# EAGLE board Navila_TugasDay0 (EAGLE 7.5.0)
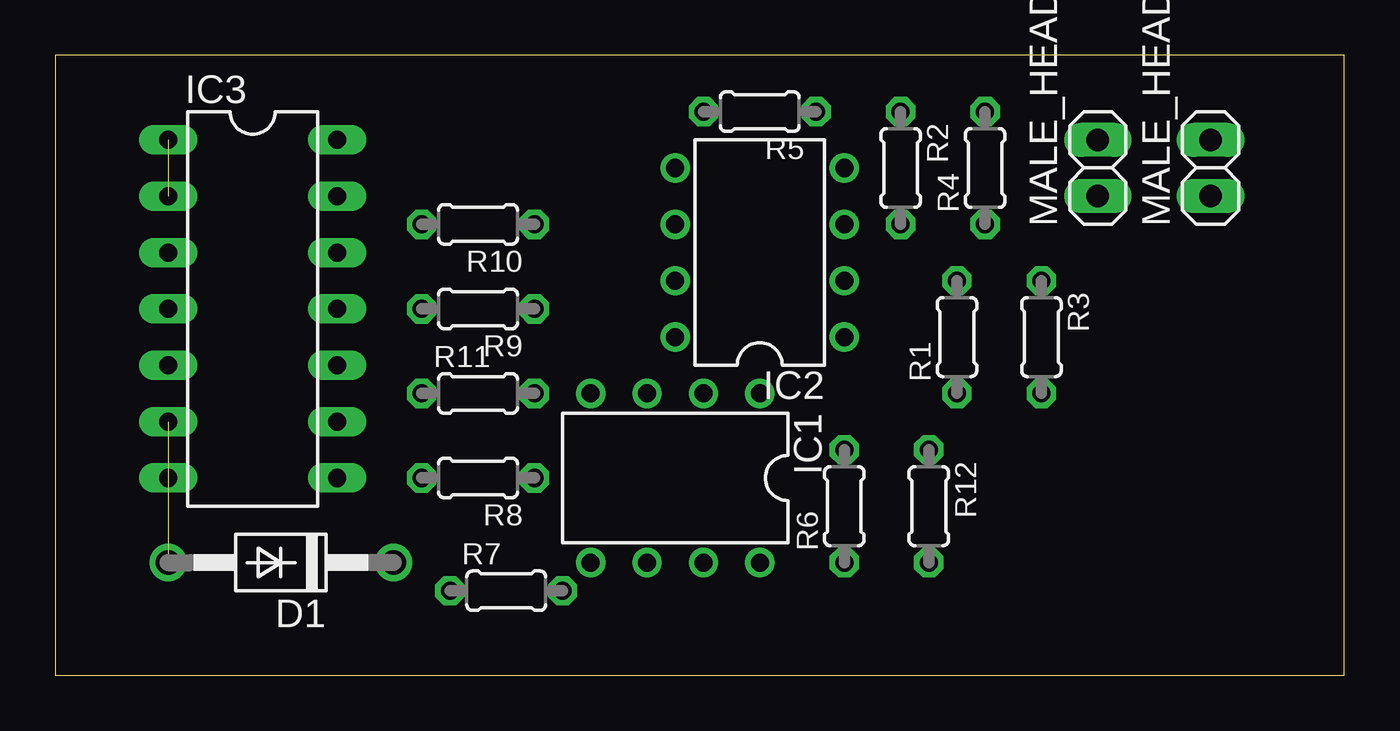
[diagram p0: board, top side]
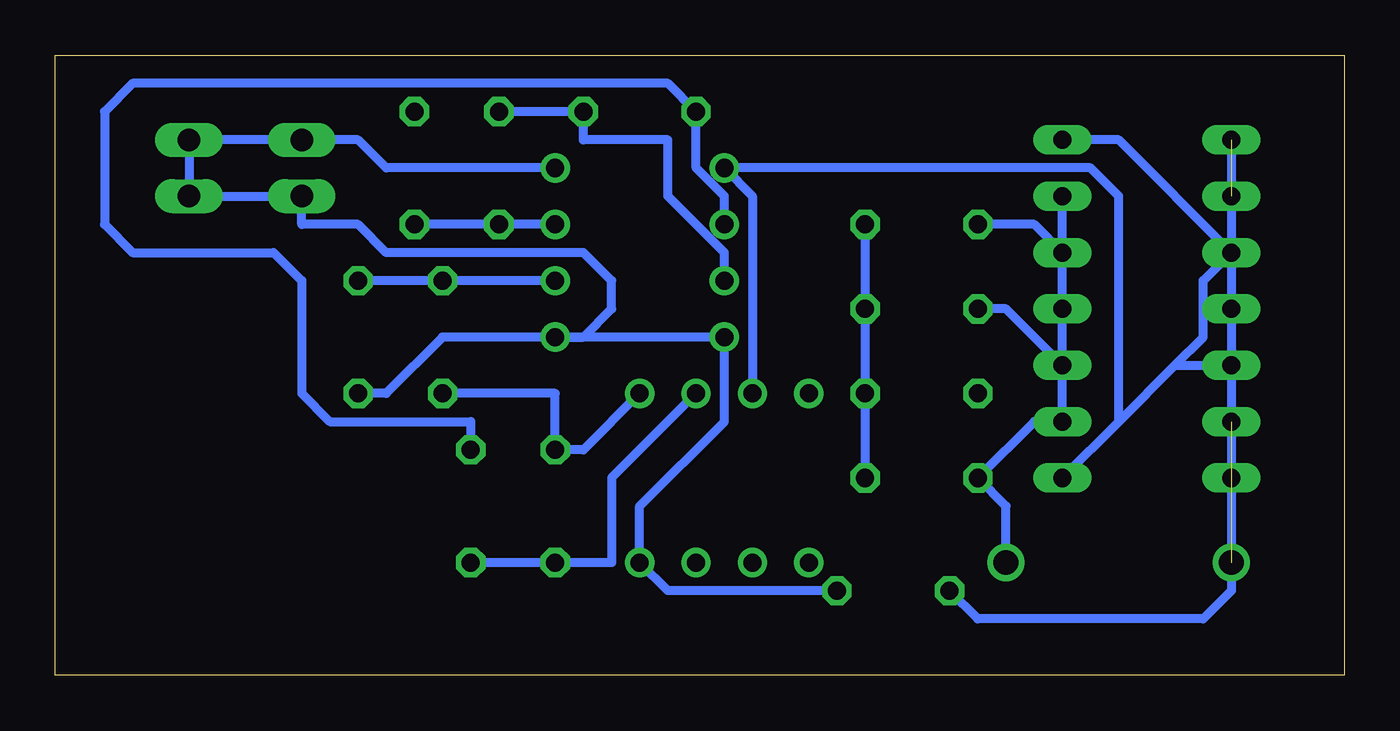
[diagram p1: board, bottom side, seen from below]

Size 58.09 x 27.93 mm. Coordinates in mm from the lower left corner, seen from the top.
Outline: 0,0 58.09,0 58.09,27.93 0,27.93 0,0
Copper layers (1*16): Top 0.035mm / dielectric 1.5mm / Bottom 0.035mm
Design rules "default": minimum track width 10mil, minimum drill 24mil, track to track 8mil, track to pad 8mil, pad to pad 8mil, via to via 8mil, smd to smd 8mil, copper to edge 40mil, drill to drill 8mil, minimum pad ring 10mil, minimum via ring 8mil, stop-mask expansion 4mil, vias tented up to drill 0mil, thermal gap 10mil

## Footprints (pad centres in the part's own frame; a part is rotated, then mirrored left to right if it is on the bottom)
DO41-10 = drill 1.118: A 5.08,0; C -5.08,0
DIL08 = drill 0.813 pad 1.27: 1 -3.81,-3.81; 2 -1.27,-3.81; 3 1.27,-3.81; 4 3.81,-3.81; 5 3.81,3.81; 6 1.27,3.81; 7 -1.27,3.81; 8 -3.81,3.81
DIL14 = drill 0.813 long: 1 -7.62,-3.81; 2 -5.08,-3.81; 3 -2.54,-3.81; 4 0,-3.81; 5 2.54,-3.81; 6 5.08,-3.81; 7 7.62,-3.81; 8 7.62,3.81; 9 5.08,3.81; 10 2.54,3.81; 11 0,3.81; 12 -2.54,3.81; 13 -5.08,3.81; 14 -7.62,3.81
1X02 = drill 1.016 long: 1 -1.27,0; 2 1.27,0
0204/5 = drill 0.813 octagon: 1 -2.54,0; 2 2.54,0

## Placement (x,y rotation side)
D1  1N4004  [DO41-10]  10.16,5.08 180 top
IC1  LM358N  [DIL08]  27.94,8.89 180 top
IC2  LM358N  [DIL08]  31.75,19.05 90 top
IC3  MAT-04Y  [DIL14]  8.89,16.51 270 top
MALE_HEADER1  [1X02]  52.07,22.86 90 top
MALE_HEADER2  [1X02]  46.99,22.86 90 top
R1  100k  [0204/5]  40.64,15.24 90 top
R2  100k  [0204/5]  38.1,22.86 270 top
R3  100k  [0204/5]  44.45,15.24 270 top
R4  100k  [0204/5]  41.91,22.86 90 top
R5  100k  [0204/5]  31.75,25.4 180 top
R6  100k  [0204/5]  35.56,7.62 90 top
R7  60k  [0204/5]  20.32,3.81 0 top
R8  12k  [0204/5]  19.05,8.89 180 top
R9  100k  [0204/5]  19.05,16.51 180 top
R10  200k  [0204/5]  19.05,20.32 180 top
R11  60k  [0204/5]  19.05,12.7 0 top
R12  1k  [0204/5]  39.37,7.62 270 top

## Library data of the parts
D1 = diode
IC1-IC3 = linear
MALE_HEADER1 MALE_HEADER2 = pinhead
R1-R12 = resistor

## Nets
AGND: IC2.4 MALE_HEADER1.2 MALE_HEADER2.2
N$1: D1.A IC3.1 IC3.2 IC3.6 IC3.7 R7.1
N$2: IC1.4
N$3: D1.C IC3.9 IC3.13 R8.2
N$4: R8.1 R9.1 R10.1 R11.2
N$5: IC2.3 R2.2 R4.1
N$6: IC2.2 R1.2 R3.1
N$8: IC1.3 IC2.5 IC3.3 IC3.5 IC3.8 IC3.14
N$9: IC3.12 R10.2
N$10: IC3.10 R9.2
N$11: R11.1
N$12: IC1.2 R6.1 R12.2
N$13: IC2.6 R5.2 R12.1
N$14: IC1.1 R1.1 R6.2
N$15: IC2.7 R2.1 R5.1
N$16: R4.2
VCC: IC1.8 IC2.1 IC2.8 MALE_HEADER1.1 MALE_HEADER2.1 R3.2 R7.2

## Tracks (layer width: path | path; a pad name or v marks a point on that pad's centre or on a via)
AGND
  Bottom 0.406: IC2.4 43.18,22.86 44.45,24.13 MALE_HEADER2.2 MALE_HEADER1.2
N$1  (3 unrouted)
  Bottom 0.406: IC3.1 D1.A 5.08,3.81 6.35,2.54 16.51,2.54 R7.1
N$3
  Bottom 0.406: D1.C 15.24,7.62 R8.2 13.97,11.43 IC3.9 IC3.13
N$4
  Bottom 0.406: R10.1 R9.1 R11.2 R8.1
N$5
  Bottom 0.406: IC2.3 R2.2 R4.1
N$6
  Bottom 0.406: IC2.2 R1.2 R3.1
N$8
  Bottom 0.406: IC3.14 10.16,24.13 IC3.3 6.35,17.78 6.35,15.24 7.62,13.97 | 10.16,11.43 7.62,13.97 | 7.62,13.97 IC3.5 | IC3.8 10.16,11.43 | IC1.3 26.67,21.59 IC2.5 11.43,22.86 10.16,21.59 10.16,11.43
N$9
  Bottom 0.406: IC3.12 13.97,20.32 R10.2
N$10
  Bottom 0.406: IC3.10 15.24,16.51 R9.2
N$12
  Bottom 0.406: IC1.2 33.02,8.89 33.02,5.08 R6.1 R12.2
N$13
  Bottom 0.406: IC2.6 27.94,21.59 29.21,22.86 R5.2 30.48,26.67 54.61,26.67 55.88,25.4 55.88,20.32 54.61,19.05 48.26,19.05 46.99,17.78 46.99,12.7 45.72,11.43 39.37,11.43 R12.1
N$14
  Bottom 0.406: IC1.1 34.29,10.16 R6.2 35.56,12.7 R1.1
N$15
  Bottom 0.406: IC2.7 27.94,19.05 30.48,21.59 30.48,24.13 34.29,24.13 R5.1 R2.1
VCC
  Bottom 0.406: R7.2 30.48,3.81 IC1.8 31.75,7.62 27.94,11.43 IC2.8 IC2.1 | IC2.1 40.64,15.24 43.18,12.7 R3.2 | IC2.1 34.29,15.24 33.02,16.51 33.02,17.78 34.29,19.05 43.18,19.05 44.45,20.32 46.99,20.32 MALE_HEADER2.1 MALE_HEADER1.1 52.07,24.13